# Altium PCB PCB2.PcbDoc
Units mm, origin at the board's own origin, x right, y up, seen from the top; angles counter-clockwise.
Board outline 100 x 50 mm, 2 copper layers (Top Layer, Bottom Layer); 26 components, 33 nets, 79 pads, 10 vias.
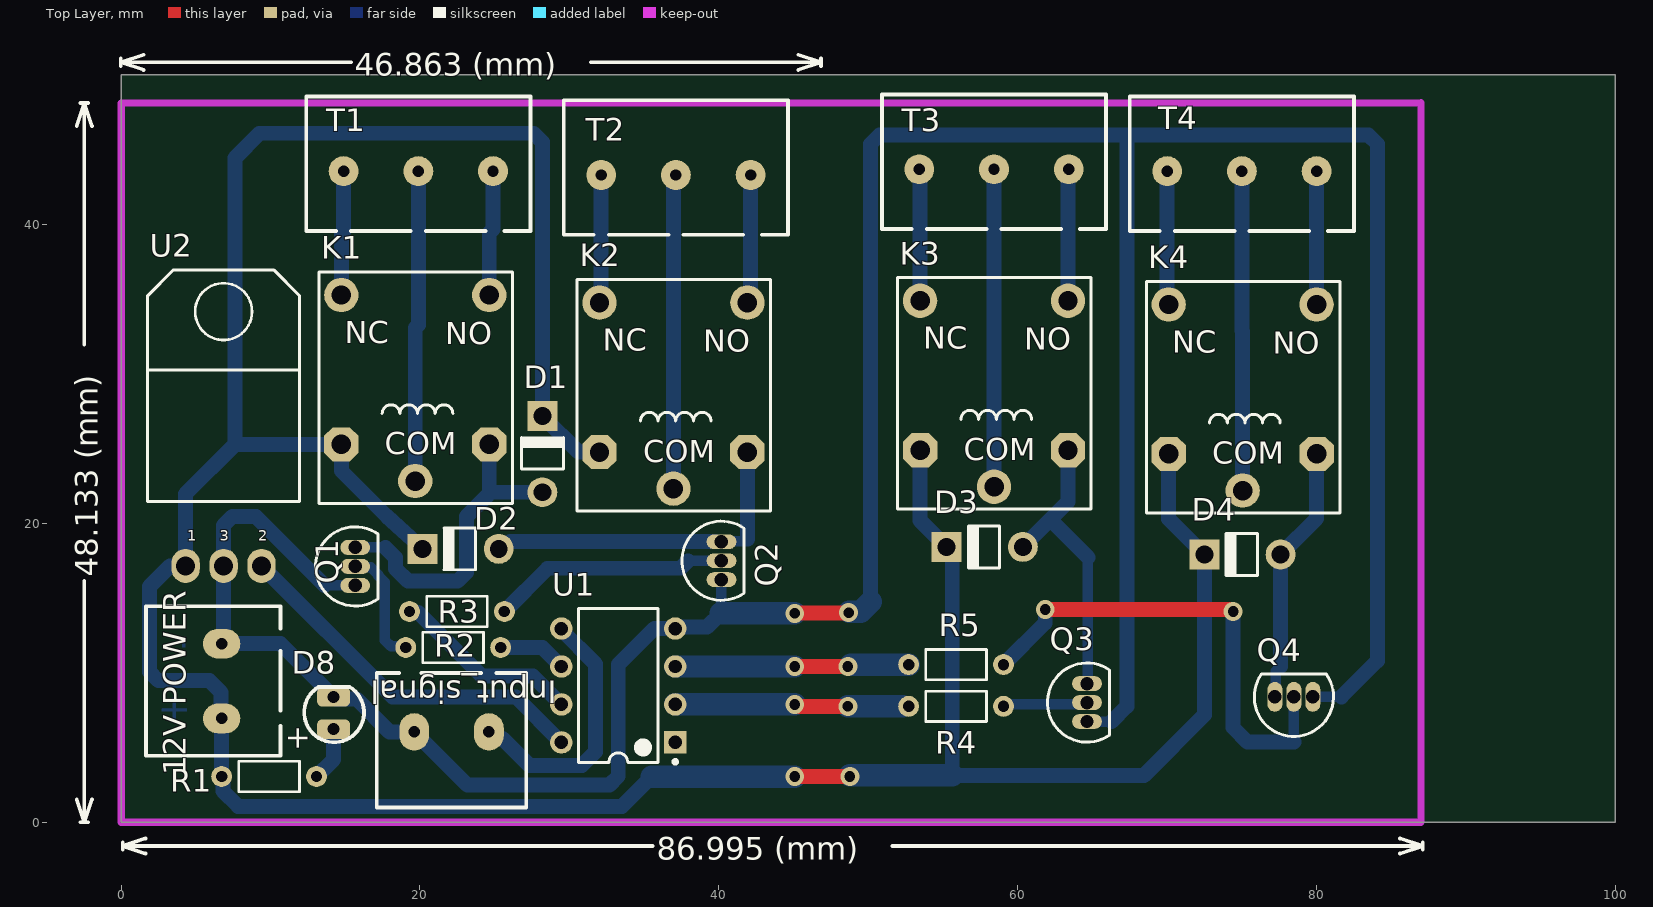
[diagram p0: Top Layer view]
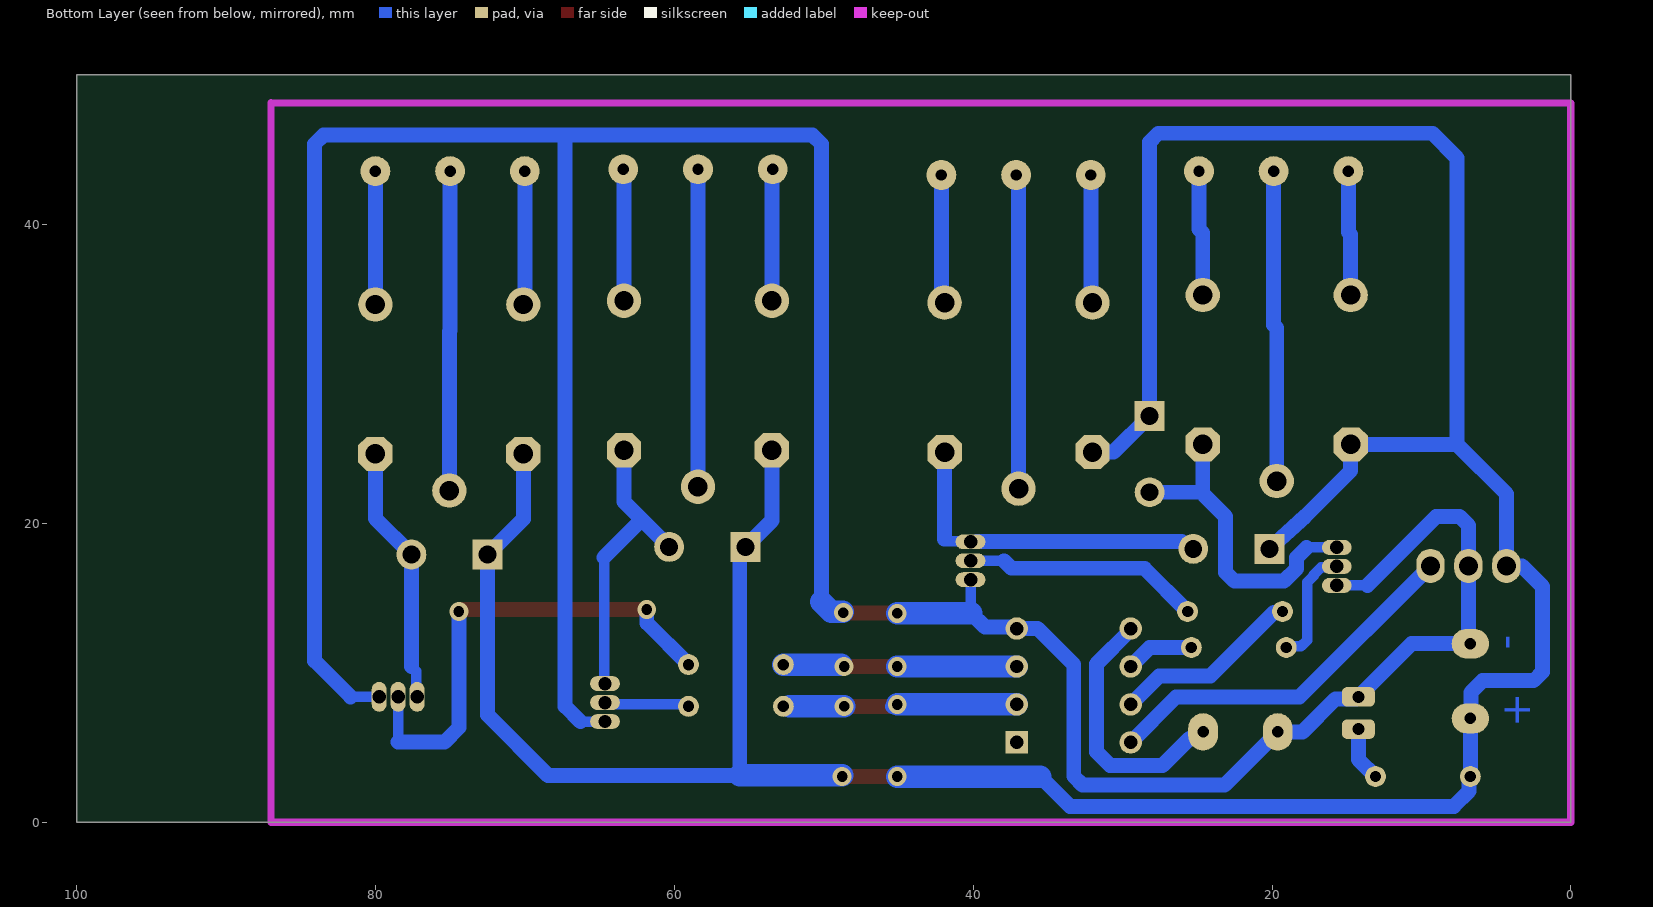
[diagram p1: Bottom Layer view, seen from below]
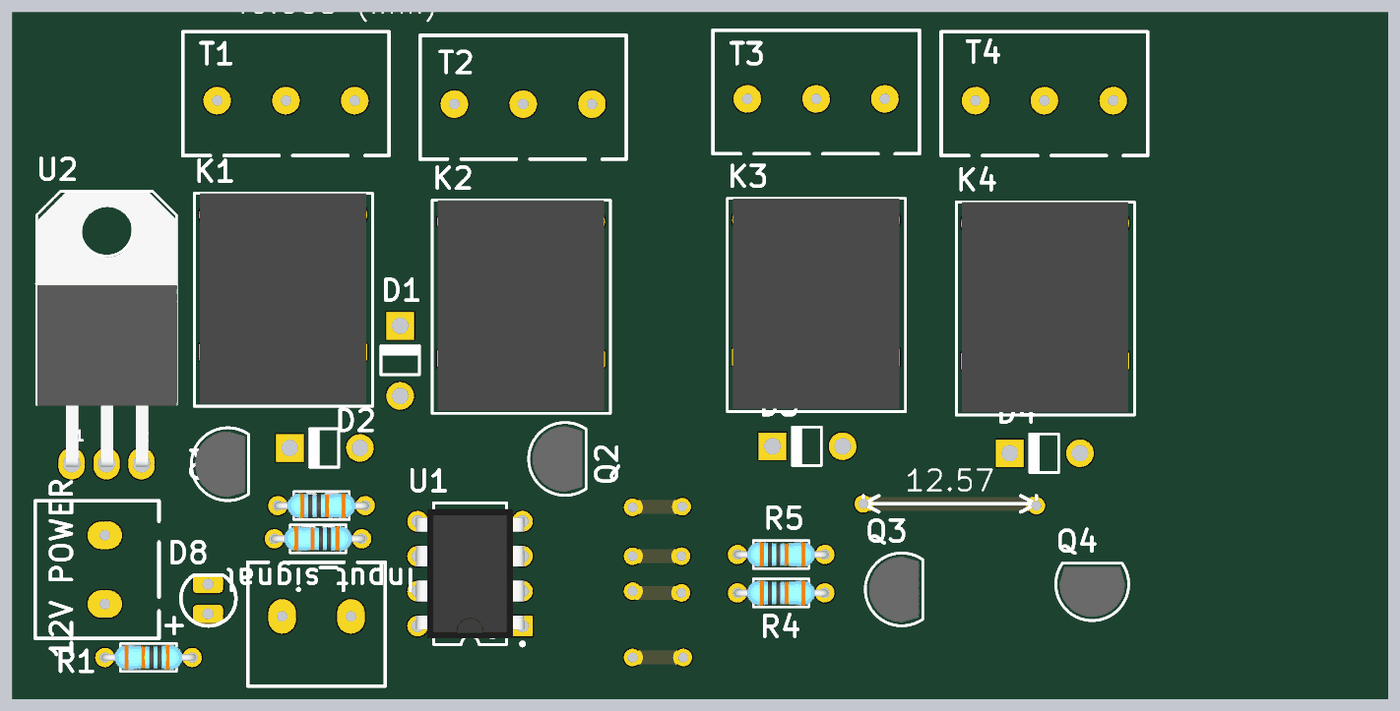
[diagram p2: 3D render of the assembled board from above, using the file's embedded part models]

## Layer stack, top to bottom
Top Solder: solder mask 0.0102, Solder Resist, Dk 3.5
Top Layer: signal copper 0.0356
Dielectric 1: dielectric 0.32, FR-4, Dk 4.8
Bottom Layer: signal copper 0.0356
Bottom Solder: solder mask 0.0102, Solder Resist, Dk 3.5

## Board outline
0,0 100,0 100,50 0,50

## Design rules (kind name [scope] priority, off if disabled: settings)
Clearance [All] p1: gap=0.3 ignorepadtopadclearanceinfootprint=TRUE
PolygonConnect [All] p1: connectstyle=Relief reliefconductorwidth=0.254 reliefentries=4 polygonreliefangle="90 Angle" airgapwidth=0.254
RoutingVias [All] p1: holewidth=0.711 width=1.27 viastyle="Through Hole" minholewidth=0.711 minwidth=1.27 maxholewidth=0.711 maxwidth=1.27
SolderMaskExpansion [All] p1: expansion=0.102 istentingtop=FALSE
Width [All] p1: maxlimit=1.5 minlimit=0.5 preferedwidth=1
30 further rules are at their usual default settings.

## Components (designator, comment, footprint, x,y, rotation, side; value= is the part's Value field where it differs from the comment)
"12V POWER" "Terminal" "Terminal 1*2" 10.668,4.445 r90 top
D1 "Diode 1N4007 vertical" "D 50mm" 28.194,27.305 r90 top
D2 "Diode 1N4007 vertical" "D 50mm" 20.043,18.288 r180 top
D3 "Diode 1N4007 vertical" "D 50mm" 55.118,18.415 r180 top
D4 "Diode 1N4007 vertical" "D 50mm" 72.367,17.907 r180 top
D8 "LED 5 mm Orange" LED-3mm 14.351,7.239 r180 top
Input_signal "Terminal" "Terminal 1*2" 27.111,9.973 r180 top
K1 "Relay" "Relay 15.40x12.10x13.10" 19.688,22.823 r0 top
K2 "Relay" "Relay 15.40x12.10x13.10" 36.967,22.315 r0 top
K3 "Relay" "Relay 15.40x12.10x13.10" 58.423,22.442 r0 top
K4 "Relay" "Relay 15.40x12.10x13.10" 75.06,22.188 r0 top
Q1 "2N3904" "2N3904 TO92" 17.018,15.24 r90 top
Q2 "2N3904" "2N3904 TO92" 41.529,15.621 r90 top
Q3 "2N3904" "2N3904 TO92" 65.992,6.131 r90 top
Q4 "2N3904" "2N3904 TO92" 80.356,9.731 r180 top
R1 "100" Res-(1/4) 9.906,3.048 r180 top
R2 "100" Res-(1/4) 22.225,11.684 r180 top
R3 "100" Res-(1/4) 22.479,14.097 r0 top
R4 "100" Res-(1/4) 55.88,7.747 r0 top
R5 "100" Res-(1/4) 55.88,10.541 r0 top
T1 "Terminal" "Terminal 1*3" 12.392,39.561 r0 top
T2 "Terminal" "Terminal 1*3" 29.631,39.307 r0 top
T3 "Terminal" "Terminal 1*3" 50.92,39.688 r0 top
T4 "Terminal" "Terminal 1*3" 67.51,39.561 r0 top
U1 "ATtiny13A-PU" "ATtiny13A-PU 8P3" 67.818,38.989 r180 top
U2 "L7805" "78XXCV - Right" 6.858,17.145 r0 top

## Footprints (in the part's own frame and the unit in brackets; to place one, negate y for a bottom-side part, rotate by r counter-clockwise, add the part's x,y. Pads: shape width x height; smd on the part's side, far side on the other; paste and mask are expansions set on the pad)
"2N3904 TO92" [mm]
  oval 1x2 hole 0.9: 1(0.6,1.349) 2(1.87,1.349) 3(3.14,1.349)
  silkscreen extent -0.78,-0.17 4.52,4, body extent -0.51,0.1 4.25,3.73, height 9.82
"78XXCV - Right" [mil] "Right Angle"
  oval 75x90 hole 50: 1(-100,0) 2(100,0) 3(0,0)
  silkscreen extent -201,170 200,780, body extent -198,-8 202,776, height 175
"ATtiny13A-PU 8P3" [mm]
  rect 1.5x1.5 hole 0.9: 1(30.734,33.655)
  round 1.5 hole 0.9: 2(30.734,31.115) 3(30.734,28.575) 4(30.734,26.035) 5(38.354,26.035) 6(38.354,28.575) 7(38.354,31.115) 8(38.354,33.655)
  silkscreen extent 30.61,24.69 37.19,35.08, body extent 30.61,25.14 38.48,34.54, height 4.36
"D 50mm" [mm] "50mm Pin Spacing"
  round 2 hole 1.2: 1(-5.23,0)
  rect 2x2 hole 1.2: 2(-0.127,0)
  silkscreen extent -3.68,-1.4 -1.48,1.4
LED-3mm [mm] "LED; 2 Leads"
  rrect50% 2.2x1.3 hole 0.8: 1(0.127,1.016) 2(0.127,-1.143)
  silkscreen extent -1.9,-1.81 2.09,1.89
"Relay 15.40x12.10x13.10" [mm]
  round 2.3 hole 1.3: 1(0,0) 2(-4.95,12.45) 3(4.95,12.45)
  oct 2.3x2.3 hole 1.3: 4(-4.95,2.45) 5(4.95,2.45)
  silkscreen extent -6.45,-1.5 6.5,14, body extent -6.05,-1.3 6.05,14, height 15.6
Res-(1/4) [mil]
  round 55 hole 30: 1(-125,0) 2(125,0)
  silkscreen extent -80,-40 80,40, body extent -135,-36 135,36, height 115
"Terminal 1*2" [mil]
  oval 78.74x98.43 hole 30: 1(98.15,155) 2(295,155)
  silkscreen extent 0,0 394,354
"Terminal 1*3" [mm]
  round 2 hole 0.762: 1(2.5,4) 2(7.5,4) 3(12.5,4)
  silkscreen extent 0,0 15,9

## Part data
"12V POWER" Input_signal: library part "Terminal 1*2", "Terminal 2 Pin 250VAC 16A", ComponentLinkURL=www.picpars.com, Designer="Seyed Mohsen Ghasemain", E-mail=picpars@gmail.com
D1 D2 D3 D4: "1 Amp General Purpose Rectifier", Publisher="seyed mohsen ghasemian"
D8: library part "LED 3mm", "Typical LED", Designer="Seyed Mohsen Ghasemian", PackageDescription="LED; 2 Leads", PackageReference=LED, Published=02/04/2012, Publisher=www.picpars.com
K1 K2 K3 K4: "SPDT Relay", Company=E.P.I.L, Design_Date=2011/10/31, Designer="Eng. Saeid Jorablo"
Q1 Q2 Q3 Q4: "npn", Collector- Base Voltage VCBO=60V, Collector- Emitter Voltage VCEO Max=40V, Collector-Emitter Saturation Voltage=0.3V, Emitter- Base Voltage VEBO=6V, Manufacturer=ONSemiconductor, Maximum DC Collector Current=0.2A, Maximum Operating Temperature=+150C, Maximum Power Dissipation=625mW, Minimum Operating Temperature=-65C, Package / Case=TO-92-3(TO-226), Package Description="3-Pin Transistor Outline, Body 4.825 x 3.685 mm, Pitch 1.27 mm", Package Reference=TO-92-3-29-11, Brand=ONSemiconductor, Configuration=Single, Datasheet URL=https://datasheet.ciiva.com/4725/2n3903-d-285841-4725808.pdf, Datasheet Version="Rev. 8, 08/2012", DC Collector/Base Gain hfe Min=60, Factory Pack Quantity=5000, Gain Bandwidth Product fT=270MHz, Manufacturer URL=http://www.onsemi.com/, Mounting Style=ThroughHole, Mounting Technology=ThroughHole, Packaging=Bulk, Product Category=BipolarTransistors-BJT, RoHS=Details, Transistor Polarity=NPN
R1 R3 R4 R5: library part Resistor, "Resistor", Power="1/4 W", Tolerance=5%
R2: library part Resistor, "Resistor", Power="1/8 W", Tolerance=5%
T1 T2 T3 T4: library part "Terminal 1*3", "Terminal 3 Pin 250VAC 16A", ComponentLinkURL=www.picpars.com, Designer="Seyed Mohsen Ghasemain", E-mail=picpars@gmail.com
U2: library part L78XXCV, "Fixed Voltage Regulator", Adding Date=1387/01/06, Company=ControTec, Designer="Saeid Jorablo"

## Via types
v1: diameter 1.27, hole 0.711, Top Layer to Bottom Layer, 10 vias

## Nets (pads, with @x,y where several pads share a name; then routed paths per layer and width w, separated by ;. In a path a pad name is that pad's centre, name@x,y a point inside that pad or via, vN(x,y) a via of type N, cw(c..) or ccw(c..) an arc to the next point about the centre after c; other vN are vias at no path point)
+5: U1.8 U2.2 | length 25
  Bottom Layer w1: U2.2 18.161,8.382 26.416,8.382 U1.8
+12: "12V POWER.1" D1.2 D2.2 D3.2 D4.2 K1.4 K2.4 K3.4 K4.4 R1.2 U2.1 | length 220.2
  Top Layer w1: v1(45.085,3.048) v1@48.692,3.048
  Bottom Layer w1: D2.2 17.78,20.472 14.738,23.514 K1.4 7.62,25.273 ; K2.4 30.607,24.765 D1.2 28.194,45.515 27.608,46.101 9.271,46.101 7.62,44.45 7.62,25.273 ; 35.514,3.048 33.523,1.058 7.832,1.058 6.807,2.083 6.807,2.972 R1.2 6.731,6.938 6.693,6.976 6.693,8.685 5.911,9.467 2.491,9.467 1.905,10.053 1.905,15.773 3.277,17.145 U2.1 4.318,21.971 7.62,25.273 ; v1@48.692,3.048 v1@48.768,3.124 ; K3.4 53.473,20.187 D3.2 55.626,18.034 55.626,3.124 68.453,3.124 72.494,7.165 D4.2 70.11,20.291 K4.4
  Bottom Layer w1.5: 35.514,3.048 v1(45.085,3.048) ; v1@48.768,3.124 55.626,3.124
  other v1: 48.768,3.048
Arduino_pin_1: R2.1 U1.6 | length 4.4
  Bottom Layer w1: R2.1@25.583,11.684 28.194,11.684 U1.6
Arduino_pin_2: R3.1 U1.7 | length 12.7
  Bottom Layer w1: R3.1 19.38,14.021 19.888,14.021 24.13,9.779 27.559,9.779 U1.7
Arduino_pin_3: R4.1 U1.2 | length 15.7
  Top Layer w1: v1@45.403,7.747 v1(48.641,7.747)
  Bottom Layer w1: v1(45.085,7.874) 45.137,7.822 45.328,7.822 v1@45.403,7.747 ; R4.1@52.297,7.747 52.348,7.798 52.629,7.798 R4.1@52.705,7.874
  Bottom Layer w1.5: U1.2 v1(45.085,7.874) ; v1(48.641,7.747) R4.1@52.297,7.747
Arduino_pin_4: R5.1 U1.3 | length 15.7
  Top Layer w1: v1(45.085,10.414) v1(48.641,10.414)
  Bottom Layer w1: v1(48.641,10.414) 48.714,10.414 v1@48.841,10.541
  Bottom Layer w1.5: U1.3 v1(45.085,10.414) ; v1@48.841,10.541 R5.1
Arduino_pin_5: Input_signal.1 U1.5 | length 17.6
  Bottom Layer w1: Input_signal.1 25.059,5.595 25.52,5.595 27.331,3.784 30.835,3.784 31.75,4.699 31.75,10.586 29.464,12.872 U1.5
GND: "12V POWER.2" D8.2 Input_signal.2 Q1.1 Q2.1 Q3.1 Q4.1 U1.4 U2.3 | length 224.3
  Top Layer w1: v1@45.037,13.994 v1@48.666,13.994
  Bottom Layer w0.7: 13.624,15.84 Q1.1 ; 40.18,14.018 Q2.1 ; Q3.1 66.294,6.731 ; Q4.1 81.661,8.382
  Bottom Layer w1: 13.624,15.84 9.017,20.447 7.444,20.447 6.858,19.861 U2.3 6.858,12.065 6.731,11.938 10.668,11.938 14.366,8.24 15.763,8.24 17.967,6.036 Input_signal.2 23.17,2.484 32.688,2.484 33.274,3.07 33.274,10.541 35.687,12.954 U1.4 37.18,13.05 39.212,13.05 40.18,14.018 ; v1(48.69,14.018) v1@48.742,14.07 ; 50.165,14.734 50.165,45.388 50.751,45.974 67.31,45.974 ; 66.294,6.731 67.31,7.747 67.31,45.974 ; 81.661,8.382 84.074,10.795 84.074,45.388 83.488,45.974 67.31,45.974
  Bottom Layer w1.5: 40.132,13.97 v1(45.085,13.97) ; v1@48.742,14.07 49.501,14.07 50.165,14.734
NetD5_1: 
NetD6_1: 
NetD7_1: 
NetD8_1: D8.1 R1.1 | length 3.6
  Bottom Layer w1: R1.1 14.224,4.191 D8.1
NetD9_1: 
NetK1_1: K1.1 T1.2 | length 20.8
  Bottom Layer w1: K1.1 19.688,33.071 19.892,33.275 T1.2
NetK1_2: K1.2 T1.1 | length 8.4
  Bottom Layer w1: K1.2 14.738,39.319 14.892,39.473 T1.1
NetK1_3: K1.3 T1.3 | length 8.4
  Bottom Layer w1: K1.3 24.638,39.421 24.892,39.675 T1.3
NetK2_1: K2.1 T2.2 | length 21.1
  Bottom Layer w1: K2.1 36.967,43.143 T2.2
NetK2_2: K2.2 T2.1 | length 8.6
  Bottom Layer w1: K2.2 32.131,34.879 T2.1
NetK2_3: K2.3 T2.3 | length 8.6
  Bottom Layer w1: K2.3 42.131,34.979 T2.3
NetK3_1: K3.1 T3.2 | length 21.2
  Bottom Layer w1: K3.1 T3.2@58.423,43.685
NetK3_2: K3.2 T3.1 | length 8.7
  Bottom Layer w1: K3.2 T3.1@53.473,43.635
NetK3_3: K3.3 T3.3 | length 8.7
  Bottom Layer w1: K3.3 T3.3@63.373,43.641
NetK4_1: K4.1 T4.2 | length 21.4
  Bottom Layer w1: T4.2 75.01,32.892 75.06,32.842 K4.1
NetK4_2: K4.2 T4.1 | length 9
  Bottom Layer w1: T4.1 70.01,34.738 K4.2
NetK4_3: K4.3 T4.3 | length 8.9
  Bottom Layer w1: K4.3 T4.3
NetQ1_2: Q1.2 R2.2 | length 7.9
  Bottom Layer w0.7: Q1.2 15.726,17.053 16.717,17.053 17.22,16.55 17.22,16.48 17.653,16.047 17.653,12.18 18.063,11.77 18.964,11.77 R2.2
NetQ2_2: Q2.2 R3.2 | length 15.9
  Bottom Layer w0.7: 37.938,17.491 Q2.2
  Bottom Layer w1: R3.2 28.545,16.988 37.435,16.988 37.938,17.491
NetQ3_2: Q3.2 R4.2 | length 5.7
  Bottom Layer w0.7: R4.2 59.188,7.88 R4.2@59.681,7.88 ; R4.2@59.682,7.881 63.811,7.881 63.873,7.944 64.586,7.944 Q3.2
NetQ4_2: Q4.2 R5.2 | length 32.8
  Top Layer w1: v1(61.849,14.224) 74.222,14.224 74.349,14.097 v1(74.422,14.097)
  Bottom Layer w0.7: 78.486,5.351 Q4.2
  Bottom Layer w1: R5.2 61.849,13.335 v1(61.849,14.224) ; v1@74.37,14.149 v1(74.422,14.097) 74.422,6.318 75.389,5.351 78.486,5.351
"Relay 1": D1.1 K1.5 Q1.3 | length 21.5
  Bottom Layer w0.7: Q1.3 17.688,18.38
  Bottom Layer w1: 17.688,18.38 18.37,17.698 18.37,16.957 19.198,16.129 22.528,16.129 23.114,16.715 23.114,20.447 24.551,21.884 ; K1.5 24.638,22.225 24.788,22.075 D1.1
"Relay 2": D2.1 K2.5 Q2.3 | length 22.7
  Bottom Layer w0.7: Q2.3@39.751,18.791 41.778,18.791 41.917,18.93
  Bottom Layer w1: D2.1 25.544,18.288 26.047,18.791 Q2.3@39.751,18.791 ; 41.917,18.93 K2.5
"Relay 3": D3.1 K3.5 Q3.3 | length 19.8
  Bottom Layer w0.7: Q3.3 64.706,9.335 64.706,17.716
  Bottom Layer w1: D3.1 62.178,20.245 ; K3.5 63.373,21.44 62.178,20.245 ; 64.706,17.716 62.178,20.245
"Relay 4": D4.1 K4.5 Q4.3 | length 17.4
  Bottom Layer w0.7: Q4.3 77.273,8.439 77.273,10.09 77.597,10.414
  Bottom Layer w1: 77.597,10.414 D4.1 80.01,20.32 K4.5
pads on no net: U1.1

## Keep-outs
Keep-Out Layer:
  lines w0.5: 0,0 0,48.095 86.995,48.133 86.995,0 0,0

## Other copper
Bottom Layer:
  text "-" at 4.953,11.541 h2 r90
  text "+" at 4.413,6.334 h2 r90

## Silkscreen, mask and mechanical layers (free items; w line width, h text height)
Top Overlay:
  lines w0.254: -2.972,1.509 -2.464,-0.015 ; -2.972,46.594 -2.464,48.118 ; -2.718,-0.015 -2.21,-0.015 ; -2.718,48.118 -2.21,48.118 ; -2.464,16.154 -2.464,-0.015 ; -2.464,31.948 -2.464,48.118 ; -1.956,1.509 -2.464,-0.015 ; -1.956,46.594 -2.464,48.118 ; -0.015,50.597 -0.015,51.105 ; 0.112,-1.854 0.112,-1.346 ; 1.509,50.343 -0.015,50.851 ; 1.509,51.359 -0.015,50.851 ; 1.636,-2.108 0.112,-1.6 ; 1.636,-1.092 0.112,-1.6 ; 15.392,50.851 -0.015,50.851 ; 31.44,50.851 46.848,50.851 ; 35.585,-1.6 0.112,-1.6 ; 45.324,50.343 46.848,50.851 ; 45.324,51.359 46.848,50.851 ; 46.848,50.597 46.848,51.105 ; 51.633,-1.6 87.107,-1.6 ; 85.583,-2.108 87.107,-1.6 ; 85.583,-1.092 87.107,-1.6 ; 87.107,-1.854 87.107,-1.346
  text "46.863 (mm)" at 15.646,49.936 h1.52
  text "48.133 (mm)" at -1.549,16.408 h1.52 r90
  text "86.995 (mm)" at 35.839,-2.515 h1.52
Mechanical 1:
  lines w0.5: 46.863,0 46.863,48.133

## Dimensions
74.422,14.097 to 61.849,14.224 on Top Overlay

## Text inside footprints (layer, text, board x,y; h text height)
D8: Top Overlay "+" at 11.176,6.477 h1.52 r270
K1: Top Overlay "NC" at 14.964,32.043 h1.5; Top Overlay "NO" at 21.695,31.992 h1.5; Top Overlay "COM" at 17.656,24.601 h1.5
K2: Top Overlay "NC" at 32.243,31.535 h1.5; Top Overlay "NO" at 38.974,31.484 h1.5; Top Overlay "COM" at 34.935,24.093 h1.5
K3: Top Overlay "NC" at 53.699,31.662 h1.5; Top Overlay "NO" at 60.43,31.611 h1.5; Top Overlay "COM" at 56.391,24.22 h1.5
K4: Top Overlay "NC" at 70.336,31.408 h1.5; Top Overlay "NO" at 77.067,31.357 h1.5; Top Overlay "COM" at 73.028,23.966 h1.5
U2: Top Overlay "3" at 6.604,18.845 h0.7; Top Overlay "2" at 9.169,18.845 h0.7; Top Overlay "1" at 4.445,18.845 h0.7